# EAGLE board tee_dweebo (EAGLE 9.6.2)
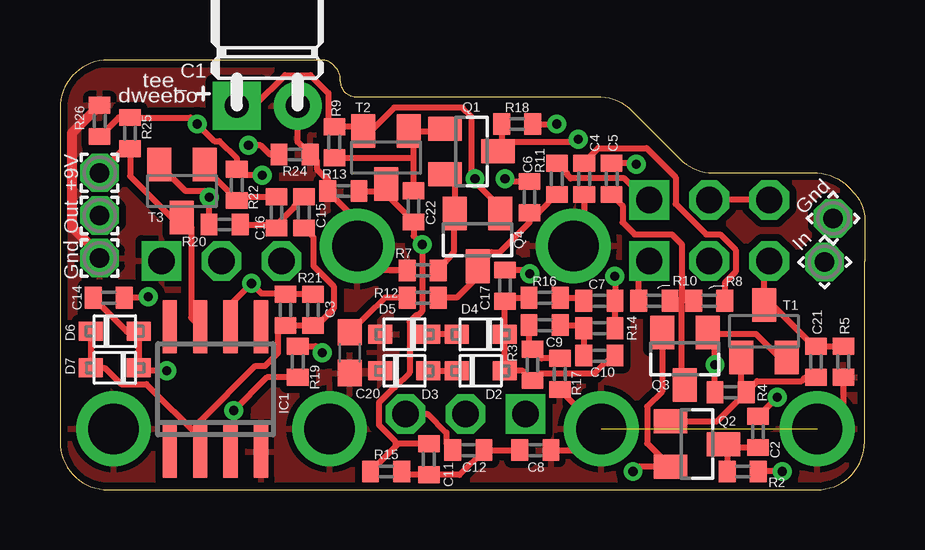
[diagram p0: board, top side]
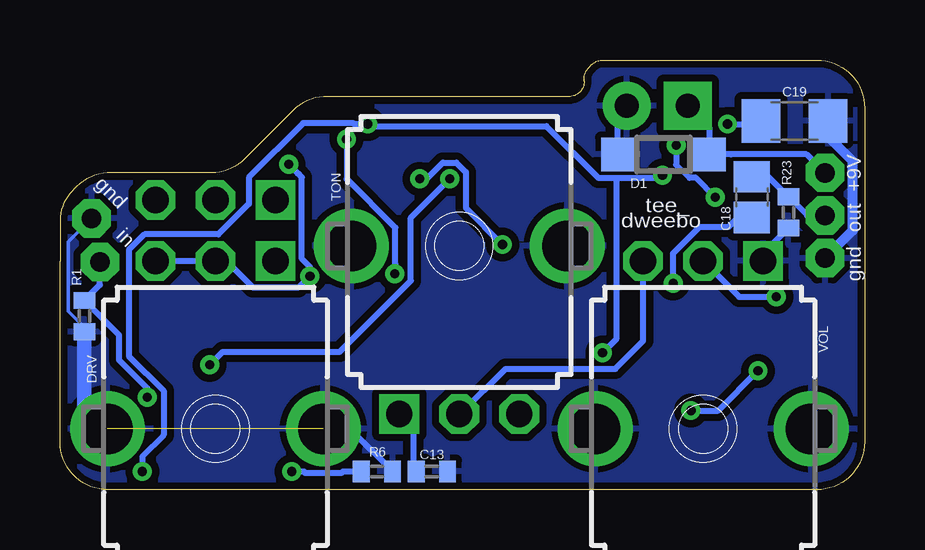
[diagram p1: board, bottom side, seen from below]

Size 33.53 x 17.91 mm. Coordinates in mm from the lower left corner, seen from the top.
Outline: 0,15.9 0,2 arc90 2,0 31.53,0 arc90 33.53,2 33.53,9.53 33.53,11.22 arc45 33.02,12.45 32.97,12.49 arc45 31.56,13.21 27.37,13.21 arc-45 25.96,13.67 23.95,15.67 arc45 22.54,16.38 12.32,16.38 arc-90 11.68,17.02 11.68,17.14 arc45 11.5,17.59 11.36,17.72 arc45 10.91,17.91 9.78,17.91 2,17.91 arc90 0,15.9
Copper layers (1*16): Top 0.035mm / dielectric 1.5mm / Bottom 0.035mm
Design rules "default *": minimum track width 6mil, minimum drill 0.35mm, track to track 6mil, track to pad 6mil, pad to pad 6mil, via to via 6mil, smd to smd 6mil, copper to edge 10mil, drill to drill 6mil, minimum pad ring 10mil, minimum via ring 8mil, stop-mask expansion 4mil, vias tented up to drill 0mil, thermal gap 10mil

## Footprints (pad centres in the part's own frame; a part is rotated, then mirrored left to right if it is on the bottom)
ELEC10UF_SM = drill 1 pad 2 square: + -5.08,1.27 | drill 1 pad 2: - -5.08,-1.27
C0402 = smd 0.7 x 0.9: 1 -0.65,0; 2 0.65,0
C0805 = smd 1.3 x 1.5: 1 -0.85,0; 2 0.85,0
C1206 = smd 1.6 x 1.8: 1 -1.4,0; 2 1.4,0
C0603 = smd 1.1 x 1: 1 -0.85,0; 2 0.85,0
SOD123 = smd 1.4 x 1.4: A 1.9,0; C -1.9,0
SOD-323F = smd 1 x 0.8: A -1,0; C 1,0
DUAL_9MM_SNAP-IN_POT = drill 1.1 square: 1 -2.5,-7; 1B -2.5,-9.54 | drill 1.1 octagon: 2 0,-7; 2B 0,-9.54; 3 2.5,-7; 3B 2.5,-9.54 | drill 2.1 pad 2.54: CHASSIS1 -4.5,0; CHASSIS2 4.5,0
SO08 = smd 0.6 x 2.2: 1 -1.905,-2.6; 2 -0.635,-2.6; 3 0.635,-2.6; 4 1.905,-2.6; 5 1.905,2.6; 6 0.635,2.6; 7 -0.635,2.6; 8 -1.905,2.6
1,6/0,8 = drill 0.813 pad 1.6 octagon: 1 0,0
SOT23 = smd 1 x 1.4: 1 -0.95,-1.1; 2 0.95,-1.1; 3 0,1.1
R0402 = smd 0.7 x 0.9: 1 -0.65,0; 2 0.65,0
SOT23-BEC = smd 1 x 1.4: B -0.95,-1.1; C 0,1.1; E 0.95,-1.1
9MM_SNAP-IN_POT = drill 1.1 square: 1 -2.5,-7 | drill 1.1 octagon: 2 0,-7; 3 2.5,-7 | drill 2.1 pad 2.794: CHASSIS1 -4.5,0; CHASSIS2 4.5,0

## Placement (x,y rotation side)
C1  100uF  [ELEC10UF_SM]  8.64,21.08 90 top
C2  100nF  [C0402]  29.08,2.41 270 top
C3  2.2nF  [C0402]  10.54,7.49 270 top
C4  150nF  [C0402]  21.84,12.95 270 top
C5  47pF  [C0402]  22.99,12.95 90 top
C6  100pF  [C0402]  19.56,12.19 90 top
C7  220pF  [C0402]  22.48,7.87 180 top
C8  5.6nF  [C0402]  19.81,1.65 0 top
C9  47nF  [C0402]  20.19,6.86 180 top
C10  100nF  [C0402]  22.48,5.59 0 top
C11  5.6nF  [C0402]  15.37,1.27 270 top
C12  18nF  [C0402]  17.02,1.65 180 top
C13  18nF  [C0402]  18.03,0.76 0 bottom
C14  47nF  [C0402]  2.03,8 180 top
C15  56nF  [C0402]  10.16,11.56 90 top
C16  56nF  [C0402]  9.02,11.56 270 top
C17  2.2nF  [C0402]  18.54,8.51 90 top
C18  10uF  [C0805]  4.7,12.19 90 bottom
C19  47uF  [C1206]  2.92,15.37 0 bottom
C20  1uF  [C0603]  12.06,5.71 270 top
C21  47pF  [C0402]  31.5,5.33 90 top
C22  100pF  [C0402]  14.73,11.81 270 top
D1  1N5819  [SOD123]  8.38,13.97 180 bottom
D2  1N914  [SOD-323F]  17.53,4.95 180 top
D3  1N914  [SOD-323F]  14.35,4.95 180 top
D4  1N914  [SOD-323F]  17.53,6.48 0 top
D5  1N914  [SOD-323F]  14.35,6.48 0 top
D6  1N914  [SOD-323F]  2.29,6.6 180 top
D7  1N914  [SOD-323F]  2.29,5.08 0 top
DRV  A250k  [DUAL_9MM_SNAP-IN_POT]  27.05,2.54 180 bottom
IC1  TL071  [SO08]  6.48,4.19 0 top
PAD1  [1,6/0,8]  1.65,13.21 0 top
PAD2  [1,6/0,8]  31.86,9.49 45 top
PAD3  [1,6/0,8]  1.65,11.43 0 top
PAD4  [1,6/0,8]  1.65,9.65 0 top
PAD5  [1,6/0,8]  32.21,11.31 45 top
Q1  SST201  [SOT23]  17.14,14.1 270 top
Q2  SST201  [SOT23]  26.54,1.91 270 top
Q3  SST201  [SOT23]  26.04,5.46 180 top
Q4  SST201  [SOT23]  17.4,10.41 180 top
R1  2M  [R0402]  32.51,7.24 90 bottom
R2  220k  [R0402]  28.45,0.76 180 top
R3  1M  [R0402]  19.68,5.21 270 top
R4  2.2k  [R0402]  27.94,4.06 0 top
R5  2.2k  [R0402]  32.64,5.33 90 top
R6  4.7k  [R0402]  20.32,0.76 180 bottom
R7  4.7k  [R0402]  15.11,9.14 0 top
R8  1.5k  [R0402]  27.05,7.87 180 top
R9  2.2k  [R0402]  11.43,14.48 270 top
R10  22k  [R0402]  24.77,7.87 180 top
R11  33k  [R0402]  20.7,12.95 90 top
R12  2.2k  [R0402]  15.11,8 0 top
R13  2.2k  [R0402]  11.81,12.45 0 top
R14  100k  [R0402]  22.48,6.73 180 top
R15  5.6k  [R0402]  13.59,0.76 0 top
R16  330k  [R0402]  20.19,8 180 top
R17  15k  [R0402]  20.83,4.83 90 top
R18  1M  [R0402]  19.05,15.24 180 top
R19  470k  [R0402]  9.91,5.33 270 top
R20  1.2k  [R0402]  6.86,11.05 180 top
R21  6.8k  [R0402]  9.4,7.49 90 top
R22  470k  [R0402]  7.37,12.7 90 top
R23  10k  [R0402]  3.17,11.56 90 bottom
R24  10k  [R0402]  9.78,13.97 0 top
R25  10k  [R0402]  2.92,14.86 90 top
R26  10k  [R0402]  1.65,15.37 270 top
T1  2N3906  [SOT23-BEC]  29.34,6.6 0 top
T2  2N3906  [SOT23-BEC]  13.59,13.84 180 top
T3  2N3904  [SOT23-BEC]  5.08,12.45 180 top
TON  B10k  [9MM_SNAP-IN_POT]  16.89,10.16 0 bottom
VOL  A100k  [9MM_SNAP-IN_POT]  6.73,2.54 180 bottom

## Library data of the parts
C1 = capacitors-elec; UFW1C101MDD1TA: 100uF
C2-C22 D2-D7 R1-R26 = adafruit
D1 = diode
DRV T1-T3 TON VOL = MusicThingModular
IC1 = linear
PAD1-PAD5 = wirepad
Q1-Q4 = transistor-fet

## Nets
D_A1: DRV.1 R10.2
D_A3: C5.2 C7.1 C21.2 DRV.2 DRV.3 R5.2 R14.1 T1.C
D_B1: DRV.1B R11.2
D_B3: DRV.2B DRV.3B
GND: C1.- C4.2 C8.2 C13.2 C19.2 C20.2 D1.A D3.C D5.A DRV.CHASSIS1 DRV.CHASSIS2 IC1.4 PAD4.1 PAD5.1 R1.1 R5.1 R6.1 R7.1 R13.1 R17.1 R23.1 R24.2 R26.1 TON.CHASSIS1 TON.CHASSIS2 VOL.1 VOL.CHASSIS1 VOL.CHASSIS2
IN: C2.1 PAD2.1 R1.2
N$1: Q2.2 Q3.2 R6.2
N$2: C2.2 Q2.3 R2.2
N$3: C21.1 Q2.1 R4.2 T1.B
N$4: C4.1 R8.1
N$5: C5.1 Q3.3 R8.2 R10.1
N$6: C9.1 C10.1 R14.2
N$7: C9.2 R3.1 R17.2
N$8: C17.2 Q1.3 R18.2
N$9: C7.2 R16.1
N$10: D2.C D3.A
N$11: D4.A D5.C
N$12: C22.1 Q1.1 R9.2 T2.B
N$13: Q1.2 Q4.2 R7.2
N$14: C6.1 Q4.3 R11.1 R12.2
N$15: C20.1 R12.1
N$16: C8.1 C11.2 C12.1 R15.2
N$17: C6.2 C11.1 C22.2 R13.2 R15.1 T2.C
N$18: C13.1 TON.1
N$19: C14.2 D6.A D7.C IC1.3 R19.2
N$20: C3.2 C15.1 D6.C D7.A IC1.2 R21.1
N$21: C3.1 C18.1 IC1.6 R21.2
N$22: C16.1 R22.1 T3.B
N$23: C15.2 C16.2 R20.1
N$24: R20.2 R24.1 T3.E
OUT: C18.2 PAD3.1 R23.2
T3: C12.2 TON.3
TO_GAIN2: C10.2 C17.1 D2.A D4.C R3.2 R16.2
V2: C14.1 VOL.2
V3: TON.2 VOL.3
VCC: C1.+ D1.C IC1.7 PAD1.1 Q3.1 Q4.1 R4.1 R9.1 R25.1 T1.E T2.E T3.C
VCC/2: C19.1 R2.1 R18.1 R19.1 R22.2 R25.2 R26.2

## Tracks (layer width: path | path; a pad name or v marks a point on that pad's centre or on a via)
D_A1
  Top 0.254: R10.2 24.11,9.1 DRV.1
D_A3  (via drill 0.38)
  Top 0.254: R5.2 C21.2 31.4,5.98 29.68,7.7 T1.C 29.34,9.33 DRV.3 | R14.1 C7.1 23.13,8.88 v23.11,8.89 | v24,13.56 23.96,13.6 C5.2
  Bottom 0.254: DRV.3 DRV.2 26.6,9.54 25.49,8.44 23.61,8.44 23.16,8.89 v23.11,8.89 23.11,9.29 23.45,9.62 23.45,13.02 23.61,13.18 23.63,13.18 v24,13.56
D_B1
  Top 0.254: R11.2 21.11,13.19 21.11,13.14 21.28,12.97 23.51,12.97 24.41,12.08 DRV.1B
D_B3
  Top 0.254: DRV.3B DRV.2B
GND  (1 unrouted)
  Top 0.254: R5.1 32.64,3.63 DRV.CHASSIS2 | R17.1 22.46,2.54 | 22.46,2.54 DRV.CHASSIS1 | C8.2 21.57,1.65 22.46,2.54 | C4.2 21.84,10.61 TON.CHASSIS1 | R7.1 13.41,9.14 TON.CHASSIS2 12.39,11.22 R13.1 11.16,12.9 10.7,13.36 10.7,13.7 R24.2 9.91,14.49 C1.-
  Top 0.406: R26.1 1.06,15.42 1.05,15.42 0.49,14.86 0.49,10.95 1.65,9.8 PAD4.1
  Bottom 0.152: R1.1 32.51,6.77 33.19,7.44 33.19,10.33 PAD5.1
  Bottom 0.254: R23.1 4.23,9.85 VOL.1 | R6.1 21.45,2.54 DRV.CHASSIS1 | D1.A 10.28,15.63 C1.- | 1.52,14.61 C19.2
  Bottom 0.406: C19.2 1.52,14.71 0.49,13.69 0.49,10.81 PAD4.1
  Bottom 0.61: R1.1 32.51,3.5 DRV.CHASSIS2
  pour Top (isolate 0.305): -0.89,18.29 -0.89,-1.27 34.67,-1.27 34.67,18.29
  pour Bottom (isolate 0.305): -0.89,18.16 -0.89,-1.27 34.67,-1.27 34.67,18.16
IN  (via drill 0.38)
  Top 0.254: C2.1 29.1,3.06 v29.89,3.85
  Bottom 0.254: v29.89,3.85 29.89,4.23 31.06,5.4 31.06,6.44 R1.2 31.86,8.54 PAD2.1
N$1  (via drill 0.38)
  Top 0.254: Q3.2 25.09,4.09 24.46,3.47 24.46,1.93 Q2.2 24.07,0.95 v23.88,0.76
  Bottom 0.254: v23.88,0.76 23.37,0.76 23.31,0.7 21.79,0.7 21.73,0.76 R6.2
N$2
  Top 0.254: R2.2 27.81,0.78 27.81,1.91 Q2.3 27.79,1.76 C2.2
N$3
  Top 0.254: Q2.1 27.38,2.85 R4.2 | R4.2 28.39,4.27 T1.B | C21.1 31.06,4.68 30.9,4.53 29.05,4.53 R4.2
N$4
  Top 0.254: R8.1 27.7,8.63 28.16,9.08 28.16,10 27.51,10.64 26.93,10.64 25.66,11.91 25.66,13.02 24.44,14.23 22.42,14.23 21.88,13.69 21.88,13.64 C4.1
N$5
  Top 0.254: Q3.3 25.91,4.49 25.91,7.87 | R8.2 25.91,7.87 | 25.91,7.87 R10.1 | C5.1 23.45,11.84 23.45,11.14 23.94,10.64 25.49,10.64 25.91,10.23 25.91,7.87
N$6
  Top 0.254: C9.1 21.7,6.86 R14.2 C10.1
N$7
  Top 0.254: R17.2 20.07,5.48 R3.1 19.54,6 C9.2
N$8  (via drill 0.38)
  Top 0.254: R18.2 18.4,14.25 Q1.3 18.63,14.48 21.46,14.48 v21.59,14.61 | C17.2 19.42,9.16 v19.58,9
  Bottom 0.254: v19.58,9 19.58,9.37 19.55,9.4 19.55,10.92 21.59,12.96 v21.59,14.61
N$9
  Top 0.254: R16.1 21.7,8 C7.2
N$10
  Top 0.254: D3.A D2.C
N$11
  Top 0.254: D4.A D5.C
N$12
  Top 0.254: C22.1 14.73,13.84 | 14.73,13.84 14.73,14.75 T2.B 15.94,14.94 Q1.1 | R9.2 11.45,13.84 14.73,13.84
N$13
  Top 0.254: Q1.2 16.45,12.74 Q4.2 16.4,11.46 16.4,9.89 R7.2
N$14
  Top 0.254: R12.2 16.52,8 17.4,8.88 Q4.3 17.98,9.9 18.33,9.9 19.56,11.13 C6.1 19.94,11.54 R11.1
N$15
  Top 0.254: C20.1 13.55,8 R12.1
N$16
  Top 0.254: R15.2 14.38,0.62 C11.2 16.64,0.62 C12.1 C8.1
N$17  (via drill 0.38)
  Top 0.254: C11.1 14.1,1.92 13.96,1.79 | 13.96,1.79 R15.1 | R13.2 13.29,12.45 T2.C 13.59,12.3 C22.2 14.73,10.58 v15.09,10.22 15.09,7.43 14.93,7.27 14.85,7.27 14.57,6.99 14.57,4.88 13.96,4.26 13.93,4.26 13.29,3.62 13.29,2.7 13.96,2.03 13.96,1.79 | C6.2 18.65,12.84 v18.54,12.95
  Bottom 0.254: v18.54,12.95 18.24,12.95 17.57,13.63 17.01,13.63 16.62,13.23 16.62,11.74 v15.09,10.22
N$18
  Bottom 0.254: C13.1 18.81,0.89 18.81,2.58 TON.1
N$19  (via drill 0.38)
  Top 0.254: C14.2 2.78,6.6 D6.A D7.C 3.41,4.95 v4.45,4.95 | IC1.3 7.24,1.72 v7.24,3.3 8.62,4.68 R19.2
  Bottom 0.254: v7.24,3.3 6.1,3.3 v4.45,4.95
N$20
  Top 0.254: D6.C D7.A 1.86,5.08 2.54,4.4 3.6,4.4 5.84,2.16 IC1.2 5.84,2.86 8.14,5.16 8.54,5.16 9.09,5.7 9.09,6.53 R21.1 C3.2 10.69,6.84 11.4,7.55 11.4,8.48 10.55,9.33 10.55,10.51 C15.1
N$21  (via drill 0.38)
  Top 0.254: IC1.6 7.11,7.73 v7.98,8.6 v7.98,8.59 8.39,8.18 9.36,8.18 R21.2 C3.1
  Bottom 0.254: v7.98,8.6 7.98,9.85 6.87,10.96 5.67,10.96 5.28,11.34 C18.1
N$22
  Top 0.254: T3.B 6.03,13.42 7.37,12.08 R22.1 7.52,12.21 C16.1
N$23
  Top 0.254: R20.1 8.88,11.05 C16.2 9.02,11.01 9.75,11.74 9.75,11.79 C15.2
N$24  (via drill 0.38)
  Top 0.254: R20.2 6.21,12.18 v6.22,12.19 6.22,12.43 6.2,12.45 5.22,12.45 T3.E | R24.1 8.74,13.97 8.36,14.35 v7.85,14.35
  Bottom 0.254: v6.22,12.19 7.02,12.99 7.3,12.99 7.85,13.55 v7.85,14.35
OUT
  Bottom 0.254: PAD3.1 2.4,11.43 R23.2 4.01,13.04 C18.2
T3
  Top 0.254: C12.2 16.1,1.92 16.1,2.39 15.32,3.16 TON.3
TO_GAIN2
  Top 0.254: R16.2 18.68,8 C17.1 18.53,7.84 D4.C D2.A 19.29,4.95 R3.2 19.98,4.85 22.28,4.85 23.02,5.59 C10.2
V2  (via drill 0.38)
  Top 0.254: v3.68,8.04 3.64,8 C14.1
  Bottom 0.254: VOL.2 5.23,8.04 v3.68,8.04
V3
  Bottom 0.254: TON.2 16.84,3.16 14.96,5.04 10.39,5.04 9.23,6.2 VOL.3
VCC  (via drill 0.38)
  Top 0.254: PAD1.1 2.65,14.21 R25.1 2.92,13.07 4.64,11.35 T3.C 5.46,10.96 5.46,7.17 IC1.7 | T1.E 29.98,5.5 29,6.48 27.06,6.48 | 27.06,6.48 Q3.1 | 27.06,6.48 27.29,6.26 v27.29,5.21 R4.1 | Q4.1 18.35,11.77 17.29,12.83 v17.29,12.95 17.15,13.09 17.15,15.54 16.77,15.92 13.92,15.92 12.94,14.94 T2.E 12.45,15.13 R9.1 11.19,15.37 11.19,16.53 10.44,17.28 9.38,17.28 8.1,16 C1.+
  Bottom 0.254: C1.+ 6.48,15.11 D1.C 5.57,13.97 2.41,13.97 PAD1.1 | v27.29,5.21 26.75,5.74 21.88,5.74 18.91,8.72 18.91,11.34 v17.29,12.95
VCC/2  (via drill 0.38)
  Top 0.254: R18.1 v20.7,15.24 | v8.42,13.1 7.61,13.1 R22.2 7.37,13.8 6.65,14.53 6.43,14.53 v5.71,15.24 5.45,15.51 R25.2 2.44,15.51 R26.2 | R19.1 10.65,5.98 v10.92,5.71 | v30.1,0.76 R2.1
  Bottom 0.254: 10.41,12.99 11.1,12.99 13.26,15.15 20.61,15.15 v20.7,15.24 21.27,15.24 21.31,15.28 23.4,15.28 25.66,13.02 25.66,11.91 26.93,10.64 30.01,10.64 30.66,10 30.66,5.57 29.21,4.13 29.21,2.28 30.1,1.39 v30.1,0.76 | 10.41,12.99 8.58,12.99 8.46,13.1 v8.42,13.1 | v5.71,15.24 4.45,15.24 C19.1 | v10.92,5.71 10.34,6.3 10.34,12.91 10.41,12.99

## Text on the board
tPlace: C1 | tee_ | dweebo | +9V | Out | Gnd | In | Gnd
bPlace: +9V | gnd | out | tee_ | dweebo | in | gnd